# Altium PCB PCB8.PcbDoc
Units mm, origin at the board's own origin, x right, y up, seen from the top; angles counter-clockwise.
Board outline 107.14 x 72.01 mm, 2 copper layers (Top Layer, Bottom Layer); 13 components, 30 nets, 105 pads, 0 vias.
Unrouted connection lines stored in the file: 4.
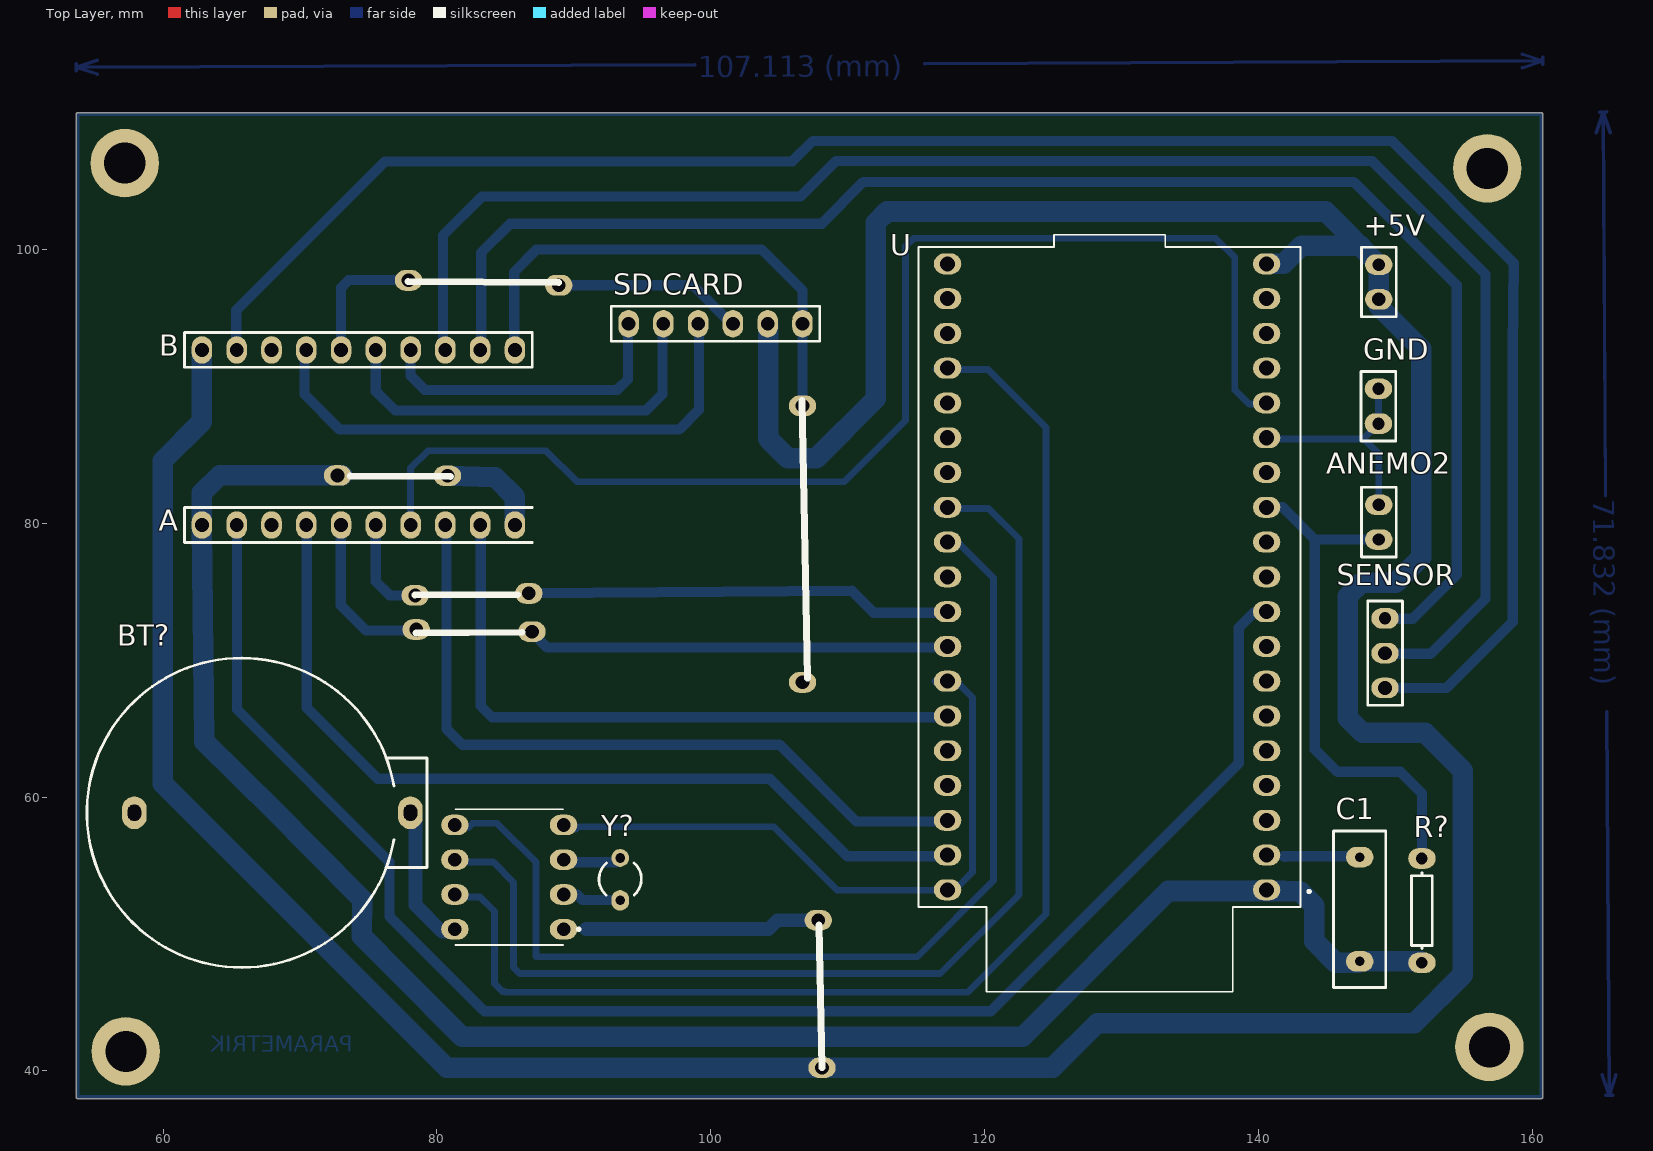
[diagram p0: Top Layer view]
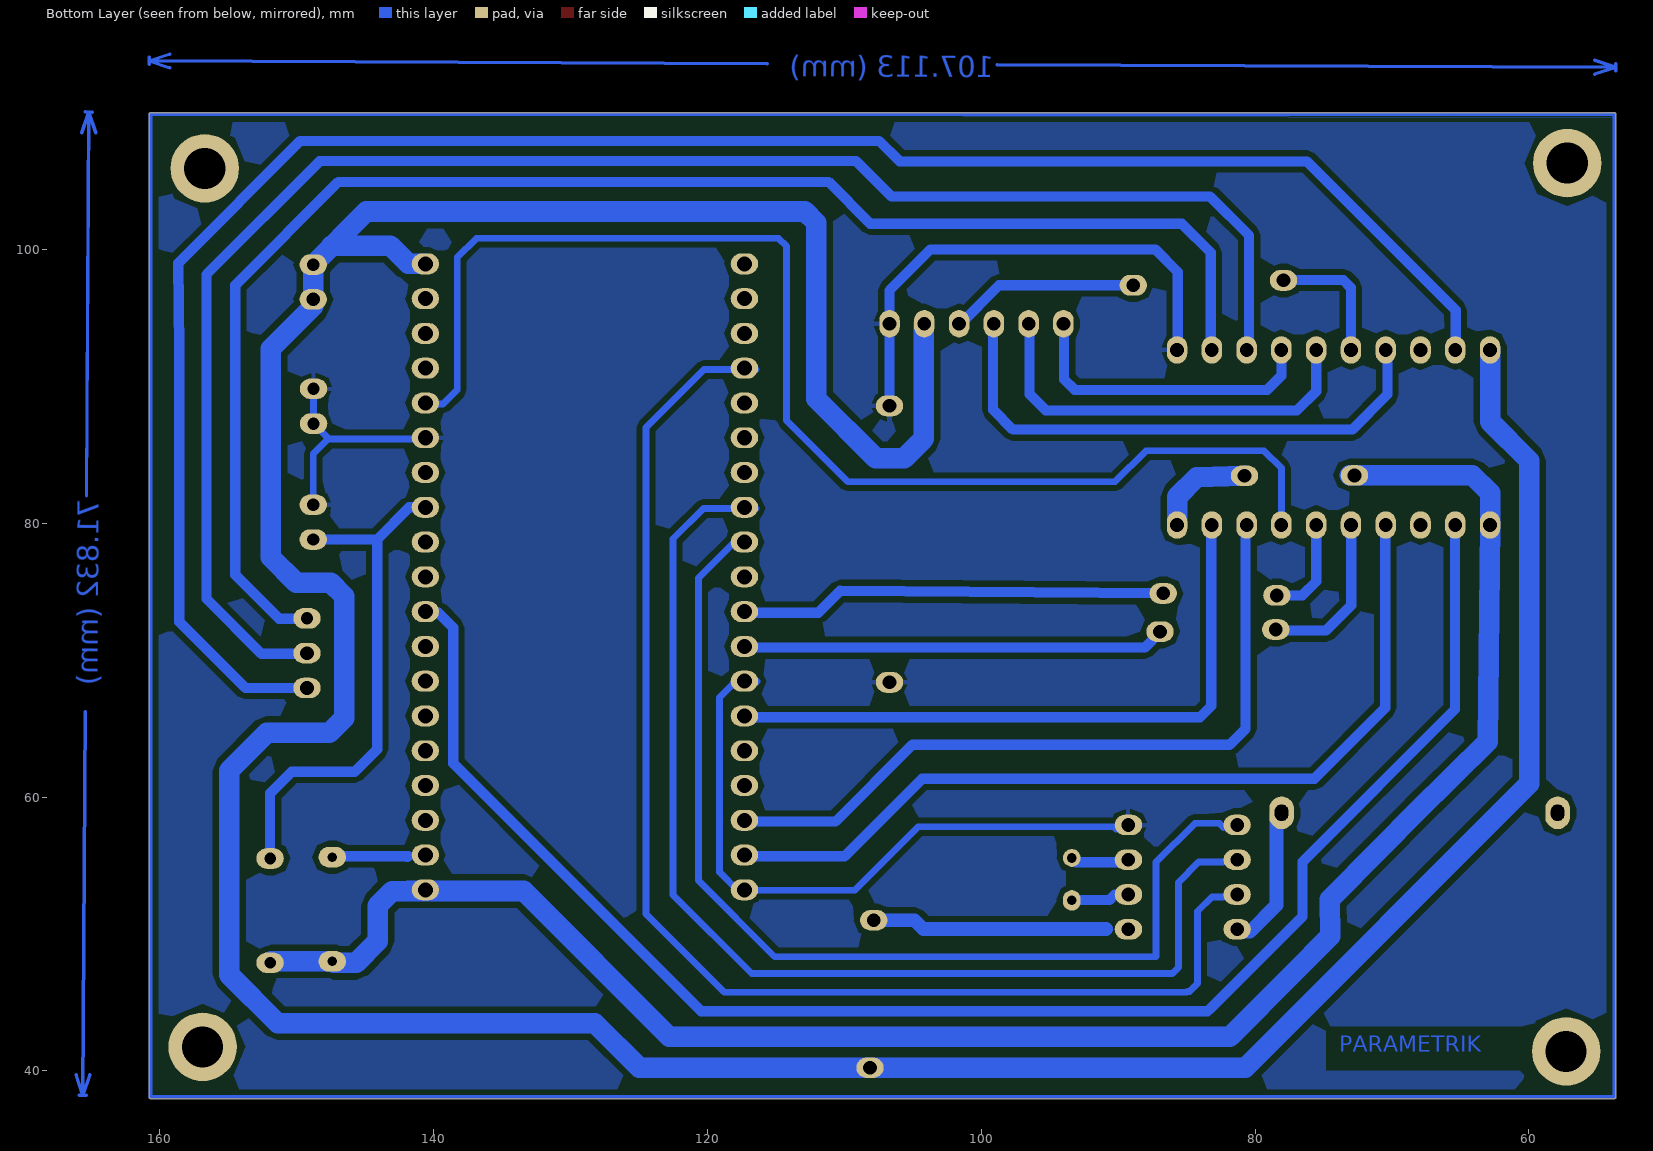
[diagram p1: Bottom Layer view, seen from below]

## Layer stack, top to bottom
Top Solder: solder mask 0.0102, Solder Resist, Dk 3.5
Top Layer: signal copper 0.0356
Dielectric 1: dielectric 0.32, FR-4, Dk 4.8
Bottom Layer: signal copper 0.0356
Bottom Solder: solder mask 0.0102, Solder Resist, Dk 3.5

## Board outline
53.644,38.1 ccw(c53.772,38.1) 53.772,37.973 160.655,37.973 ccw(c160.655,38.1) 160.782,38.1 160.782,109.855 ccw(c160.655,109.855) 160.655,109.982 53.772,109.982 ccw(c53.772,109.855) 53.644,109.855

## Design rules (kind name [scope] priority, off if disabled: settings)
Clearance [All] p1: gap=0.4
ComponentClearance [All] p1: gap=0.254 collisioncheckmode=3 verticalgap=0.3 showdistances=FALSE
HoleSize [All] p1: absolutevalues=TRUE maxlimit=2.54 minlimit=1 maxpercent=80.000 minpercent=20.000
PolygonConnect [All] p1: connectstyle=Relief reliefconductorwidth=0.3 reliefentries=4 polygonreliefangle="90 Angle" airgapwidth=0.3
RoutingVias [All] p1: holewidth=0.711 width=1.27 viastyle="Through Hole" minholewidth=0.711 minwidth=1.27 maxholewidth=0.711 maxwidth=1.27
SolderMaskExpansion [All] p1: expansion=0.15
UnpouredPolygon [All] p1: allowunpoured=FALSE
Width [All] p1: maxlimit=2 minlimit=0.5 preferedwidth=0.75
27 further rules are at their usual default settings.

## Components (designator, comment, footprint, x,y, rotation, side; value= is the part's Value field where it differs from the comment)
+5V "" HDR1X2#1 148.796,96.349 r90 top
A "Header 10" HDR1X10#1 62.84,79.871 r0 top
ANEMO2 "" HDR1X2#2 148.796,81.349 r270 top
B "Header 10" HDR1X10#2 62.84,92.659 r0 top
BT? "BAT3volt" BTH2032 65.684,58.852 r180 top
C1 "Cap" RAD-0.3 147.397,51.805 r270 top
GND "" HDR1X2#2 148.768,87.278 r90 top
R? "Res1" AXIAL-0.3 151.943,51.704 r90 top
"SD CARD" "" HDR1X6 94,94.571 r0 top
SENSOR "" HDR1X3 149.25,73.05 r270 top
U "ESP32-DEVKITC" MODULE_ESP32-DEVKITC 129.134,76.073 r180 top
Y? "XTAL" R38 93.386,54 r180 top
? "DS1302" DIP794W47P254L991H457Q8 85.284,54.153 r180 top

## Footprints (in the part's own frame and the unit in brackets; to place one, negate y for a bottom-side part, rotate by r counter-clockwise, add the part's x,y. Pads: shape width x height; smd on the part's side, far side on the other; paste and mask are expansions set on the pad)
AXIAL-0.3 [mm] "Axial Device, Thru-Hole; 2 Leads; 0.3 in Pin Spacing"
  oval 1.5x2 hole 0.85: 1(-3.81,0) 2(3.81,0)
  silkscreen extent -2.77,-0.76 2.77,0.76
BTH2032 [mm] "CR2032 BATTERY HOLDER"
  oval 1.8x2.4 hole 1 slot 1.2 at 90 deg: 1(-12.38,0) 2(7.78,0)
  silkscreen extent -13.6,-11.3 11.25,11.3, body extent -13.45,-11 11.05,11, height 8.5
DIP794W47P254L991H457Q8 [mm]
  oval 2x1.5 hole 1: 1(-3.97,3.81) 2(-3.97,1.27) 3(-3.97,-1.27) 4(-3.97,-3.81) 5(3.97,-3.81) 6(3.97,-1.27) 7(3.97,1.27) 8(3.97,3.81)
  silkscreen extent -5.17,-4.96 3.94,4.95
HDR1X2#1 [mm] "Connector; Header; 2 Position"
  oval 1.5x2 hole 1: 1(0,0)
  oval 1.5x2 hole 0.9: 2(2.54,0)
  silkscreen extent -1.27,-1.27 3.81,1.27
HDR1X2#2 [mm] "Connector; Header; 2 Position"
  oval 1.5x2 hole 0.9: 1(0,0) 2(2.54,0)
  silkscreen extent -1.27,-1.27 3.81,1.27
HDR1X3 [mm] "Connector; Header; 3 Position"
  oval 1.5x2 hole 0.9: 1(0,0)
  oval 1.5x2 hole 1: 2(2.54,0) 3(5.08,0)
  silkscreen extent -1.27,-1.27 6.35,1.27
HDR1X6 [mm] "Connector; Header; 6 Position"
  oval 1.5x2 hole 1: 1(0,0) 2(2.54,0) 3(5.08,0) 4(7.62,0) 5(10.16,0) 6(12.7,0)
  silkscreen extent -1.27,-1.27 13.97,1.27
HDR1X10#1 [mm] "Connector; Header; 10 Position"
  oval 1.5x2 hole 1 unplated: 1(0,0) 2(2.54,0) 3(5.08,0) 4(7.62,0) 5(10.16,0) 6(12.7,0) 7(15.24,0) 8(17.78,0) 9(20.32,0) 10(22.86,0)
  silkscreen extent -1.27,-1.27 24.13,1.27
HDR1X10#2 [mm] "Connector; Header; 10 Position"
  oval 1.5x2 hole 1: 1(0,0) 2(2.54,0) 3(5.08,0) 4(7.62,0) 5(10.16,0) 6(12.7,0) 7(15.24,0) 8(17.78,0) 9(20.32,0) 10(22.86,0)
  silkscreen extent -1.27,-1.27 24.13,1.27
MODULE_ESP32-DEVKITC [mm]
  oval 2x1.53 hole 1.1: 1(-11.466,22.85) 2(-11.466,20.31) 3(-11.466,17.77) 4(-11.466,15.23) 5(-11.466,12.69) 6(-11.466,10.15) 7(-11.466,7.61) 8(-11.466,5.07) 9(-11.466,2.53) 10(-11.466,-0.01) 11(-11.466,-2.55) 12(-11.466,-5.09) 13(-11.466,-7.63) 14(-11.466,-10.17) 15(-11.466,-12.71) 16(-11.466,-15.25) 17(-11.466,-17.79) 18(-11.466,-20.33) 19(-11.466,-22.87) 20(11.834,-22.87) 21(11.834,-20.33) 22(11.834,-17.79) 23(11.834,-15.25) 24(11.834,-12.71) 25(11.834,-10.17) 26(11.834,-7.63) 27(11.834,-5.09) 28(11.834,-2.55) 29(11.834,-0.01) 30(11.834,2.53) 31(11.834,5.07) 32(11.834,7.61) 33(11.834,10.15) 34(11.834,12.69) 35(11.834,15.23) 36(11.834,17.77) 37(11.834,20.31) 38(11.834,22.85)
  silkscreen extent -14.67,-25 13.95,30.3
R38 [mm] "Crystal, Thru-Hole; 2 Leads; Body 3.1 x 8.2 mm (Dia.xH)"
  oval 1.3x1.5 hole 0.7: 1(0,1.55)
  round 1.3 hole 0.7: 2(0,-1.55)
  silkscreen extent -1.55,-1.19 1.55,1.17
RAD-0.3 [mm] "Radial Cap, Thru-Hole; 2 Leads; 0.3 in Pin Spacing"
  oval 1.5x2 hole 0.7: 1(-3.81,0) 2(3.81,0)
  silkscreen extent -5.71,-1.91 5.71,1.91

## Part data
+5V ANEMO2 GND: library part "Header 2", "Header, 2-Pin"
A B: "Header, 10-Pin"
BT?: library part BATH_CR2032, "BATTERY HOLDER, CR2032"
C1: "Capacitor"
R?: "Resistor"
"SD CARD": library part "Header 6", "Header, 6-Pin"
SENSOR: library part "Header 3", "Header, 3-Pin"
U: "- Transceiver; 802.11 b/g/n _Wi-Fi, WiFi, WLAN_, Bluetooth® Smart 4.x Low Energy _BLE_ For Use With ESP32-WROOM32"
Y?: "Crystal Oscillator"
?: "Real Time Clock _RTC_ IC Clock/Calendar 31B 8-DIP _0.300, 7.62mm_"

## Free pads (board coordinates)
  oval 2x1.5 hole 1: 0(107.848,51.003) 0(108.128,40.234) 1(72.746,83.49) 1(78.41,74.727) 1(78.486,72.238) 1(80.772,83.464) 1(86.944,72.085)
  oval 2x1.524 hole 1: 1(106.705,88.57) 2(86.716,74.879) 2(106.705,68.377) 3(77.927,97.739) 4(88.9,97.384)
  round 5 hole 3 unplated: HOLE(57.201,106.299)
  round 5 hole 3: HOLE(57.277,41.427) HOLE(156.718,105.918) HOLE(156.87,41.758)

## Nets (pads, with @x,y where several pads share a name; then routed paths per layer and width w, separated by ;. In a path a pad name is that pad's centre, name@x,y a point inside that pad or via, vN(x,y) a via of type N, cw(c..) or ccw(c..) an arc to the next point about the centre after c; other vN are vias at no path point)
1: ?.2 Y?.1 | length 3.2
  Bottom Layer w0.75: ?.2@90.254,52.883 90.659,52.477 Y?.1@93.257,52.477
2: ?.3 Y?.2 | length 3.5
  Bottom Layer w0.75: ?.3@90.043,55.246 93.082,55.246 Y?.2
18: pad.2@86.716,74.879 U.30 | length 30.4
  Bottom Layer w0.75: pad.2@86.716,74.879 110.312,75.06 111.916,73.456 U.30@116.459,73.456
19: pad.1@86.944,72.085 U.31 | length 30
  Bottom Layer w0.75: pad.1@86.944,72.038 88.066,70.916 U.31@116.459,70.916
+3.3V: A.1 C1.2 pad.1@72.746,83.49 R?.1 U.1 | length 136.6
  Bottom Layer w1.5: pad.1@73.09,83.515 64.135,83.515 62.84,82.22 A.1 62.996,64.048 68.202,58.944 70.921,56.198 74.536,52.548 74.522,49.838 77.245,47.088 81.839,42.494 122.782,42.494 133.428,53.14 141.855,53.14 141.859,53.136 143.031,53.136 144.094,52.073 144.094,49.457 145.669,47.882 147.284,47.882 C1.2 151.842,47.995 R?.1
+5V: "SD CARD.5" +5V.1 +5V.2 B.1 pad.0@108.128,40.234 U.19 | length 279.8
  Bottom Layer w1.5: B.1 62.84,87.427 59.969,84.557 59.969,60.985 80.721,40.234 124.968,40.234 128.219,43.485 151.384,43.485 154.94,47.041 154.94,61.925 152.183,64.682 147.622,64.682 146.533,65.771 146.533,74.667 147.532,75.667 150.047,75.667 151.892,77.512 151.892,92.746 148.796,95.841 +5V.1 +5V.2 144.917,102.768 112.878,102.768 112.065,101.956 112.065,89.103 107.721,84.76 105.613,84.76 104.216,86.157 104.216,94.571 ; U.19 141.834,98.943 143.173,100.282 147.48,100.282
A1: A.2 U.9 | length 117.9
  Bottom Layer w0.75: A.2@65.253,79.871 65.405,79.719 65.405,66.396 76.53,55.27 76.53,51.301 83.356,44.475 ; 83.49,44.348 120.447,44.348 138.557,62.459 138.557,72.365 139.648,73.456 U.9@140.6,73.456
A3: A.4 U.37 | length 64.7
  Bottom Layer w0.75: A.4@70.485,79.871 70.485,66.523 75.667,61.341 104.318,61.341 109.983,55.676 U.37@117.3,55.676
A4: A.5 pad.1@78.486,72.238 | length 12.1
  Bottom Layer w0.75: A.5@72.974,79.871 72.974,74.016 74.828,72.161 pad.1@78.486,72.161
A5: A.6 pad.1@78.41,74.727 | length 7.4
  Bottom Layer w0.75: A.6 75.54,75.742 76.556,74.727 pad.1@78.41,74.727
A6: A.7 U.15 | length 93.6
  Bottom Layer w0.5: A.7 78.08,84.024 79.35,85.293 87.96,85.293 90.221,83.033 109.753,83.033 114.224,87.503 114.224,100.236 114.801,100.813 136.884,100.813 138.278,99.419 138.278,89.738 139.32,88.696 U.15@140.6,88.696
A7: A.8 U.36 | length 53.4
  Bottom Layer w0.75: A.8@80.696,79.871 80.696,64.999 81.864,63.83 105.029,63.83 110.643,58.216 U.36@116.459,58.216
A8: A.9 U.33 | length 46.9
  Bottom Layer w0.75: A.9@83.21,79.985 83.21,66.65 84.024,65.836 U.33@116.459,65.836
ANEMO1: B.2 SENSOR.3 | length 142.9
  Bottom Layer w0.75: B.2@65.507,92.659 65.354,92.812 65.354,95.555 76.225,106.426 105.969,106.426 107.467,107.925 149.733,107.925 158.657,99.001 158.572,92.725 158.572,72.796 153.746,67.97 SENSOR.3@148.993,67.97
ANEMO2: ANEMO2.2 R?.2 U.12 | length 38.4
  Bottom Layer w0.75: U.12 141.772,81.163 144.126,78.809 ; ANEMO2.2 144.126,78.809 ; R?.2@151.917,55.539 R?.2 151.943,60.271 150.362,61.852 145.771,61.852 144.126,63.497 144.126,78.809
CLK: ?.7 U.23 | length 95.8
  Bottom Layer w0.5: 82.314,52.706 83.154,52.706 84.201,51.66 84.201,46.373 84.778,45.796 84.938,45.796 84.988,45.745 118.778,45.745 124.485,51.453 124.485,86.995 120.244,91.236 U.23@116.459,91.236
CS: "SD CARD.1" B.7 | length 22.6
  Bottom Layer w0.75: B.7 78.08,90.78 79.121,89.738 93.167,89.738 93.955,90.526 93.955,94.571
DATA: ?.6 U.27 | length 82.5
  Bottom Layer w0.5: 82.314,55.246 84.12,55.246 85.598,53.768 85.598,47.567 86.048,47.117 116.764,47.117 122.504,52.857 122.504,78.867 120.295,81.076 U.27@116.459,81.076
EN: C1.1 U.2 | length 5.6
  Bottom Layer w0.75: 141.92,55.615 141.859,55.676 C1.1@147.336,55.676
GND: "SD CARD.6" ?.4 ANEMO2.1 B.10 GND.1 GND.2 pad.1@106.705,88.57 pad.2@106.705,68.377 U.14 U.32 U.38 | length 101.4
  Bottom Layer w0.5: ?.4@90.17,57.659 90.346,57.836 104.597,57.836 109.242,53.191 116.405,53.191 116.459,53.136 117.75,53.136 119.126,54.512 119.126,67.262 118.012,68.376 116.459,68.376 U.32@116.382,68.453 ; U.14@140.6,86.156 147.646,86.156 GND.1 GND.2 ; 147.711,86.156 148.796,85.071 ANEMO2.1
  Bottom Layer w0.75: B.10@85.649,92.571 85.649,98.349 87.3,100 103.708,100 106.705,97.003 106.705,88.57 pad.1@106.909,88.367
MISO: B.5 pad.3 | length 9.9
  Bottom Layer w0.75: B.5@73.152,92.507 B.5 73,97.206 73.558,97.765 77.496,97.765 pad.3@77.783,98.052
"MISO JUMP": "SD CARD.4" pad.4 | length 13.9
  Bottom Layer w0.75: pad.4 98.704,97.384 101.62,94.468
MOSI: "SD CARD.3" B.4 | length 39.7
  Bottom Layer w0.75: B.4@70.333,92.38 70.333,89.408 72.898,86.843 97.688,86.843 99.136,88.29 99.136,94.571
Net_8: ?.8 BT?.1 | length 10.6
  Bottom Layer w1: BT?.1@78.166,59.004 78.435,58.735 78.435,52.114 80.383,50.166 ?.8@81.237,50.166
OE: A.10 pad.1@80.772,83.464 | length 7.6
  Bottom Layer w1.5: pad.1@80.772,83.464 84.252,83.363 85.7,81.915 A.10
RST/CE: ?.5 U.28 | length 75.4
  Bottom Layer w0.5: 82.314,57.786 82.612,58.085 84.402,58.085 87.242,55.245 87.242,48.362 87.376,48.362 87.401,48.336 115.087,48.336 120.65,53.899 120.65,75.997 118.059,78.588 U.28@117.3,78.588
SCK: "SD CARD.2" B.6 | length 30.2
  Bottom Layer w0.75: B.6 75.54,89.637 76.937,88.24 95.301,88.24 96.469,89.408 96.469,94.571
SCL: B.8 SENSOR.2 | length 122.8
  Bottom Layer w0.75: B.8@80.442,92.571 80.442,101.016 83.287,103.861 106.553,103.861 109.144,106.451 148.314,106.451 156.591,98.174 156.591,74.473 152.578,70.46 SENSOR.2@149.479,70.46
SDA: B.9 SENSOR.1 | length 111.4
  Bottom Layer w0.75: B.9@83.236,92.571 83.236,99.771 85.344,101.879 108.102,101.879 111.15,104.927 146.952,104.927 154.483,97.397 154.483,76.229 151.279,73.025 SENSOR.1@149.25,73.025
VCC: ?.1 pad.0@107.848,51.003 | length 17.2
  Bottom Layer w1: 90.878,50.368 104.242,50.368 104.877,51.003 pad.0@107.848,51.003
pads on no net: A.3 B.3 BT?.2 U.3 U.4 U.5 U.6 U.7 U.8 U.10 U.11 U.13 U.16 U.17 U.18 U.20 U.21 U.22 U.24 U.25 U.26 U.29 U.34 U.35
copper on no net: | length 518.5
  Bottom Layer w0.254: 53.669,113.563 53.671,113.055 ; 55.192,113.824 53.67,113.309 ; 55.196,112.808 53.67,113.309 ; 98.821,113.502 53.67,113.309 ; 115.631,113.574 160.782,113.767 ; 159.256,114.268 160.782,113.767 ; 159.26,113.252 160.782,113.767 ; 160.781,114.021 160.783,113.513 ; 164.687,108.509 165.185,110.036 ; 164.931,110.034 165.439,110.037 ; 165.1,39.726 165.617,38.205 ; 165.354,82.017 165.185,110.036 ; 165.363,38.203 165.871,38.206 ; 165.449,66.223 165.617,38.205 ; 165.703,108.515 165.185,110.036 ; 166.116,39.732 165.617,38.205 ; 53.772,38.1 160.655,38.1 160.655,109.855 53.772,109.855 53.772,38.1

## Polygon pours and split planes (outlines as drawn)
GND on Bottom Layer "bottom layer " (solid, shelved, pour order 4): 53.772,109.601 53.772,37.973 53.85,38.051 160.767,38.051 160.767,109.938 160.753,109.953
GND on Bottom Layer "bottom layer " (solid, pour order 6): 53.772,109.525 53.772,37.973 160.528,37.973 160.655,38.1 160.426,38.329 160.426,110.007

## Other copper
Bottom Layer:
  text "107.113 (mm)" at 99.079,112.589 h1.52 r0.24
  text "71.832 (mm)" at 164.441,81.758 h1.52 r270.34
  text "PARAMETRIK" at 73.838,40.996 h2

## Silkscreen, mask and mechanical layers (free items; w line width, h text height)
Top Overlay:
  lines w0.5: 73.675,83.439 81.001,83.414 ; 77.894,97.65 88.9,97.587 ; 78.384,74.752 85.903,74.778 ; 78.486,71.984 86.233,72.034 ; 106.655,88.976 107.077,68.68 ; 107.899,50.648 108.128,40.234